# Altium PCB Wheel_Encoder_PCB_Final.PcbDoc
Units mil, origin at the board's own origin, x right, y up, seen from the top; angles counter-clockwise.
Board outline 1220.47 x 1233.89 mil, 2 copper layers (Top Layer, Bottom Layer); 7 components, 8 nets, 27 pads, 0 vias.
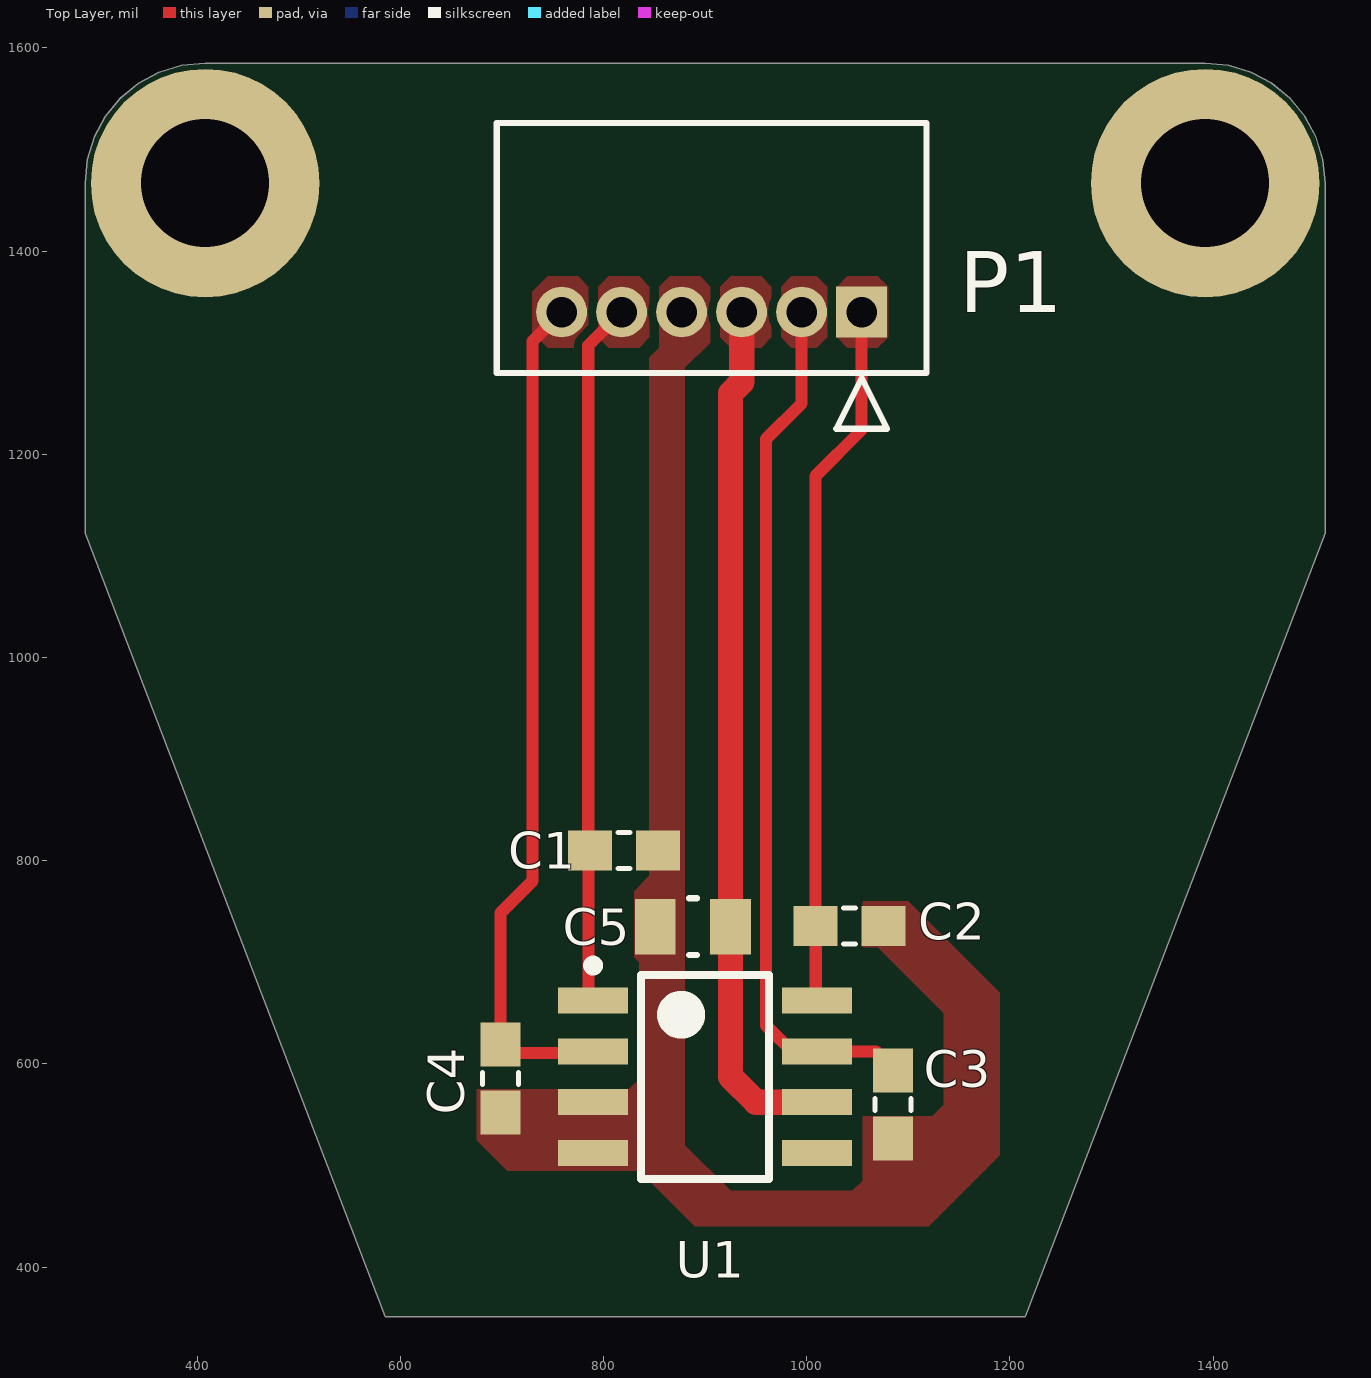
[diagram p0: Top Layer view]
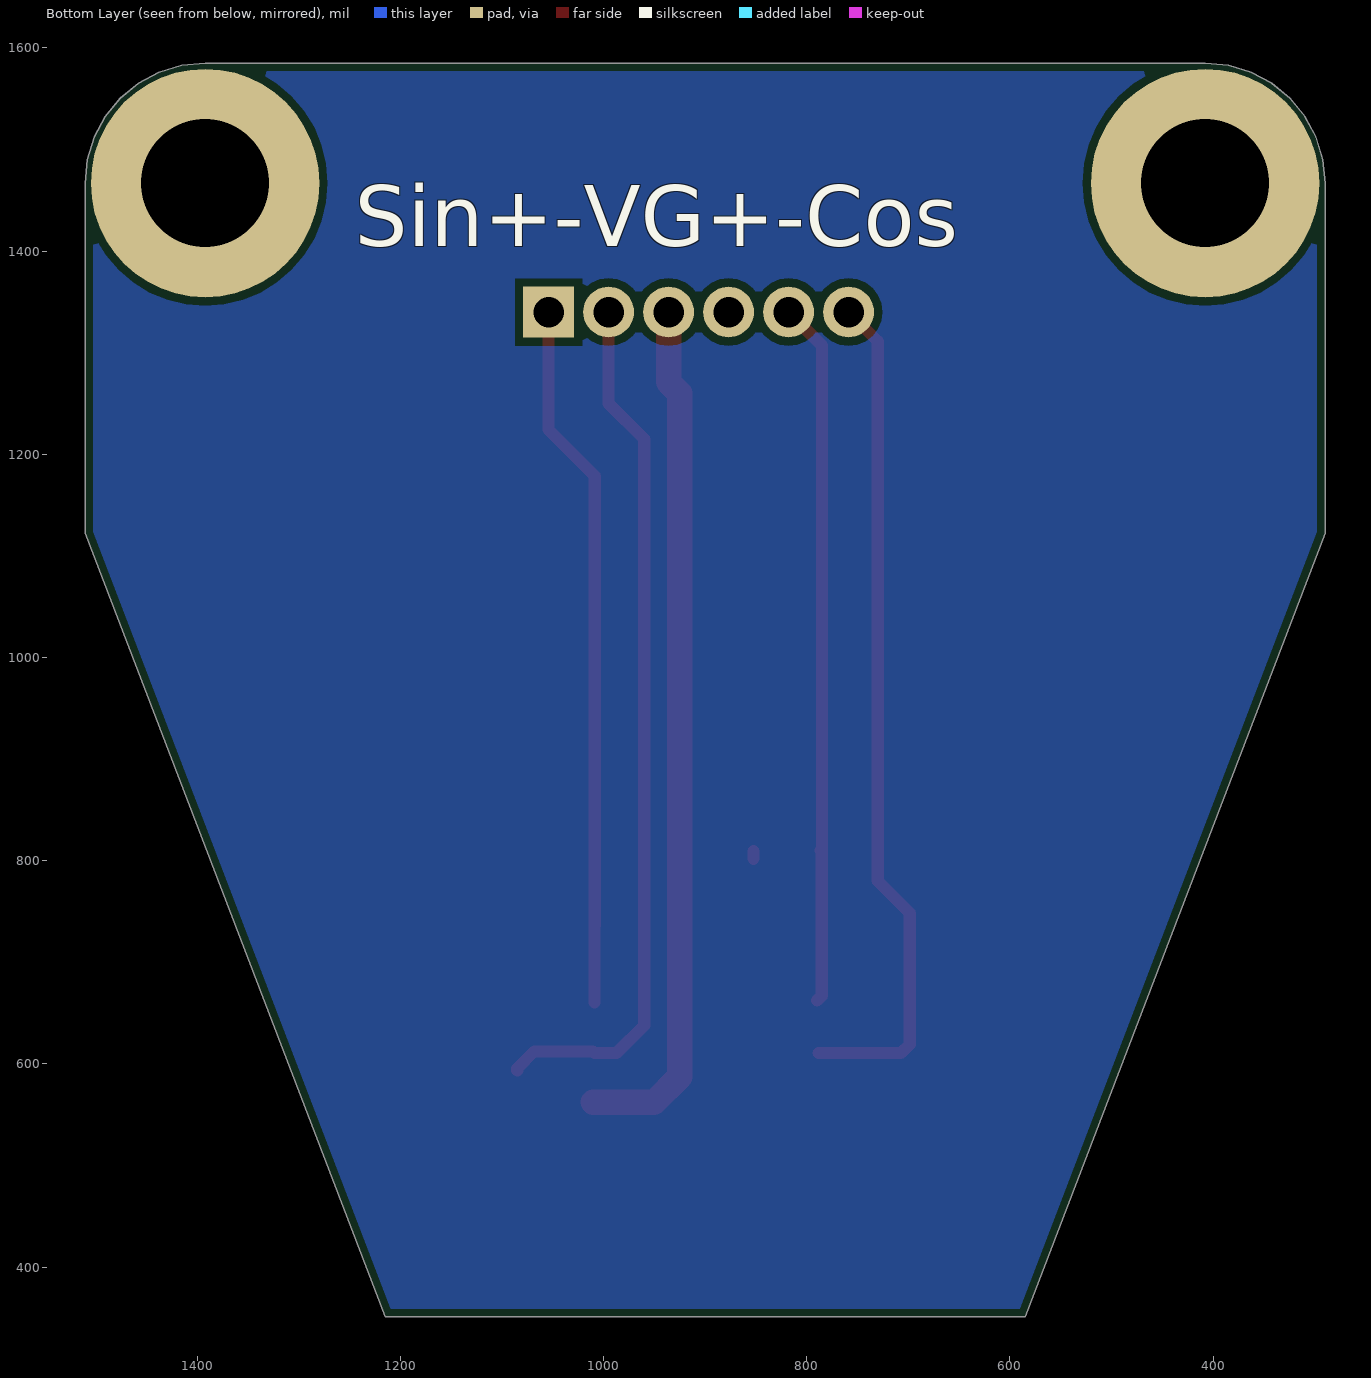
[diagram p1: Bottom Layer view, seen from below]

## Layer stack, top to bottom
Top Solder: solder mask 0.4, Solder Resist, Dk 3.5
Top Layer: signal copper 1.4
Dielectric 1: dielectric 12.6, FR-4, Dk 4.8
Bottom Layer: signal copper 1.4
Bottom Solder: solder mask 0.4, Solder Resist, Dk 3.5

## Board outline
407.87,1585 384.83,1582.73 362.68,1576.01 342.26,1565.09 324.36,1550.41 309.67,1532.51 298.75,1512.09 292.03,1489.93 289.76,1466.89 289.76,1122.31 585.04,351.11 1214.96,351.11 1510.24,1122.31 1510.24,1466.89 1507.97,1489.93 1501.25,1512.09 1490.33,1532.51 1475.64,1550.41 1457.74,1565.09 1437.32,1576.01 1415.17,1582.73 1392.13,1585

## Design rules (kind name [scope] priority, off if disabled: settings)
BoardOutlineClearance [All] p1: gap=7.87 ignorepadtopadclearanceinfootprint=FALSE except(15.75: Arc-SplitBarrior Arc-SplitContinuation Track-SplitBarrior Track-SplitContinuation SMDPad-SplitBarrior SMDPad-SplitContinuation THPad-SplitBarrior THPad-SplitContinuation Via-SplitBarrior Via-SplitContinuation Fill-SplitBarrior Fill-SplitContinuation Poly-SplitBarrior Poly-SplitContinuation Region-SplitBarrior Region-SplitContinuation Text-SplitBarrior Text-SplitContinuation)
Clearance "Clearance Bottom Layer" [OnLayer('Bottom Layer')] p1: gap=8 ignorepadtopadclearanceinfootprint=TRUE except(10: Arc-Text Track-Text SMDPad-Text THPad-Text Via-Text Fill-Text Poly-Text Region-Text Text-Text)
Clearance "Clearance Top Layer" [OnLayer('Top Layer')] p2: gap=8 ignorepadtopadclearanceinfootprint=TRUE except(10: Arc-Text Track-Text SMDPad-Text THPad-Text Via-Text Fill-Text Poly-Text Region-Text Text-Text)
Clearance [All] p3: gap=7.87 ignorepadtopadclearanceinfootprint=FALSE except(3.5: Arc-Arc Arc-Track Arc-SMDPad Track-Track Track-SMDPad SMDPad-SMDPad; 5: Arc-Via Track-Via SMDPad-Via THPad-Via Via-Via; 10: Arc-Text Track-Text SMDPad-Text THPad-Text Via-Text Fill-Text Poly-Text Region-Text Text-Text)
HoleSize [All] p1: absolutevalues=TRUE maxlimit=248.03 minlimit=7.87 maxpercent=80.000 minpercent=20.000
MinimumAnnularRing [All] p1: minimumring=3
MinimumSolderMaskSliver [All] p1: minsoldermaskwidth=3.94
PolygonConnect PolygonConnect_1 [All] p1: connectstyle=Direct reliefconductorwidth=20 reliefentries=4 polygonreliefangle="90 Angle" airgapwidth=10
RoutingCorners [All] p1: cornerstyle=Round minsetback=100 maxsetback=100
RoutingVias [All] p1: holewidth=19.68 width=39.37 viastyle="Through Hole" minholewidth=7.87 minwidth=17.72 maxholewidth=39.37 maxwidth=78.74
SilkToSilkClearance [All] p1: silktosilkclearance=3.94
SilkToSolderMaskClearance [IsPad] p1: minsilkscreentomaskgap=3.94 clearancetoexposedcopper=TRUE
SolderMaskExpansion [All] p1: expansion=4 istentingtop=FALSE
Width [All] p1: maxlimit=100 minlimit=3.5 preferedwidth=15
25 further rules are at their usual default settings.

## Classes and differential pairs
component class Wheel_Encoder_Board_Schematic1: C1 C4 C5 U1

## Components (designator, comment, footprint, x,y, rotation, side; value= is the part's Value field where it differs from the comment)
C1 "0.068uF" 0603 820,810 r0 top
C2 "0.068uF" 0603 1042.09,735.59 r0 top
C3 "0.068uF" 0603 1085,560 r90 top
C4 "0.068uF" 0603 698.63,585.59 r90 top
C5 "0.1uF 25V" 0805 888,735 r0 top value=0.1uF
P1 "S6B-ZR(LF)(SN)" S6B-ZR_JST 1054.06,1340 r180 top (schematic designator P?)
U1 "TLE5501" 8-SOIC 900,587.33 r0 top

## Footprints (in the part's own frame and the unit in brackets; to place one, negate y for a bottom-side part, rotate by r counter-clockwise, add the part's x,y. Pads: shape width x height; smd on the part's side, far side on the other; paste and mask are expansions set on the pad)
8-SOIC [mm]
  rect 1.75x0.65 smd: 1(-2.8,1.905) 2(-2.8,0.635) 3(-2.8,-0.635) 4(-2.8,-1.905) 5(2.8,-1.905) 6(2.8,-0.635) 7(2.8,0.635) 8(2.8,1.905)
  silkscreen extent -2.92,-2.55 1.6,2.9, body extent -2,-2.55 2,2.55, height 1.7
0603 [mm]
  rect 1.1x1 smd: 1(-0.85,0) 2(0.85,0)
  silkscreen extent -0.15,-0.45 0.15,0.45
0805 [mil]
  rect 40x55 smd: 1(-37,0) 2(37,0)
  silkscreen extent -4,-28 4,28
S6B-ZR_JST [mil]
  rect 50x50 hole 30 mask+0: 1(0,0)
  round 50 hole 30 mask+0: 2(59.06,0) 3(118.11,0) 4(177.17,0) 5(236.22,0) 6(295.28,0)
  silkscreen extent -64,-186 359,115, body extent 0,0 10,10, height 10

## Part data
C1 C2 C3 C4: library part "CAP 0.068uF 16V", "CAP CER 0.068UF 16V X5R 0603/0805", Operating Temperature="-55°C ~ 85°C", Package=0603/0805, Rating=16V, Temperature Coefficient=X5R, Tolerance=10%
C5: library part "CAP 0.1uF 25V", "CAP CER 0.1UF 25V X7R 0805", Operating Temperature="-55°C ~ 125°C", Rating=25V, Temperature Coefficient=X7R, Tolerance=10%
P1: "No Description Available", Built_By=EMA_UL_Team, Copyright="Copyright (C) 2018 Accelerated Designs. All rights reserved", Manufacturer_Part_Number=S6B-ZR(LF)(SN), RefDes=RefDes, SourceLibrary=JST_2017-04-18, Type=DEV, Vendor=JST
U1: "TMR 360deg Magnetic Encoder", Digi-Key Part Number=TLE5501E0001XUMA1DKR-ND, Manufacturer="Infineon Technologies", Manufacturer Part Number=TLE5501E0001XUMA1, Package=PG-DSO-8-16, Supplier Part Number 1=TLE5501E0001XUMA1CT-ND, Supplier 1=Digi-Key

## Free pads (board coordinates)
  round 225 hole 125.98: 1(407.87,1466.89) 1(1392.13,1466.89)
  round 225 / inner round 60 / far side round 60 hole 125.98: 5(407.87,1466.89)

## Nets (pads, with @x,y where several pads share a name; then routed paths per layer and width w, separated by ;. In a path a pad name is that pad's centre, name@x,y a point inside that pad or via, vN(x,y) a via of type N, cw(c..) or ccw(c..) an arc to the next point about the centre after c; other vN are vias at no path point)
D1: C4.2 P1.6 U1.2 | length 839.1
  Top Layer w12: P1.6 730,1311.22 730,780 698.63,748.63 C4.2 707.09,610.59 U1.2@788.39,610.59
D2: C1.1 P1.5 U1.1 | length 693.8
  Top Layer w12: C1.1@785.16,810 785.16,666.93 U1.1 ; C1.1 785,811.54 785,1307.17 P1.5
D3: C1.2 C2.2 C3.1 C4.1 C5.1 P1.4 U1.3 U1.4 | length 7.5
  Top Layer w12: C1.2@852.37,801.91 C1.2@852.37,809.41
D4: C5.2 P1.3 U1.6 | length 852.8
  Top Layer w25: P1.3 935.95,1270.95 925,1260 925,587.31 949.98,562.33 U1.6
D5: C3.2 P1.2 U1.7 | length 860.6
  Top Layer w12: P1.2 995,1250 960,1215 960,637.81 987.21,610.59 U1.7@1008.86,610.59 ; U1.7 1068.1,612.33 1085,595.43 C3.2
D6: C2.1 P1.1 U1.8 | length 698.3
  Top Layer w12: U1.8@1008.86,660.59 1008.86,735.36 C2.1 1008.63,1178.63 1054.06,1224.06 P1.1
Pad2: pad.1@1392.13,1466.89
Shield: pad.5
pads on no net: U1.5

## Polygon pours and split planes (outlines as drawn)
D3 on Top Layer "NONET_L-01_P-001" (solid, pour order 10): 855,1305 855,1365 865,1375 895,1375 905,1365 905,1310 880,1285 880,520 925,475 1045,475 1055,485 1055,548.37 1123.37,548.37 1135,560 1135,650 1070,715 1055,715 1055,760 1100,760 1190,670 1190,510 1120,440 890,440 835,495 705,495 675,525 675,575 825,575 835,585 835,700 830,705 830,770 845,785 845,1295
D1 on Top Layer "D1_L01_P001" (solid, pour order 1): 730,1360 730,1320 745,1305 775,1305 785,1315 785,1365 775,1375 745,1375
D2 on Top Layer "D2_L01_P002" (solid, pour order 2): 795,1365 795,1315 805,1305 835,1305 845,1315 845,1365 835,1375 805,1375
D4 on Top Layer "D4_L01_P005" (solid, pour order 5): 915,1365 915,1315 925,1305 955,1305 965,1315 965,1365 955,1375 925,1375
D5 on Top Layer "D5_L01_P007" (solid, pour order 7): 975,1365 975,1315 985,1305 1010,1305 1020,1315 1020,1365 1010,1375 985,1375
D6 on Top Layer "D6_L01_P008" (solid, pour order 8): 1030,1365 1030,1315 1040,1305 1070,1305 1080,1315 1080,1365 1070,1375 1040,1375
no net on Bottom Layer "NONET_L-01_P-001" (solid, pour order 11): 205,1680 215,1670 1620,1670 1620,0 200,0

## Silkscreen, mask and mechanical layers (free items; w line width, h text height)
Bottom Overlay:
  text "Sin+-VG+-Cos" at 1245,1405 h60
Mechanical 1:
  the board outline again, w10

## Dimensions
407.87,1466.89 to 1392.13,1466.89 on Dimensions
1392.13,1466.89 to 900,587.33 on Dimensions